# EAGLE board MSP-EXP430FR4133 (EAGLE 6.5.0)
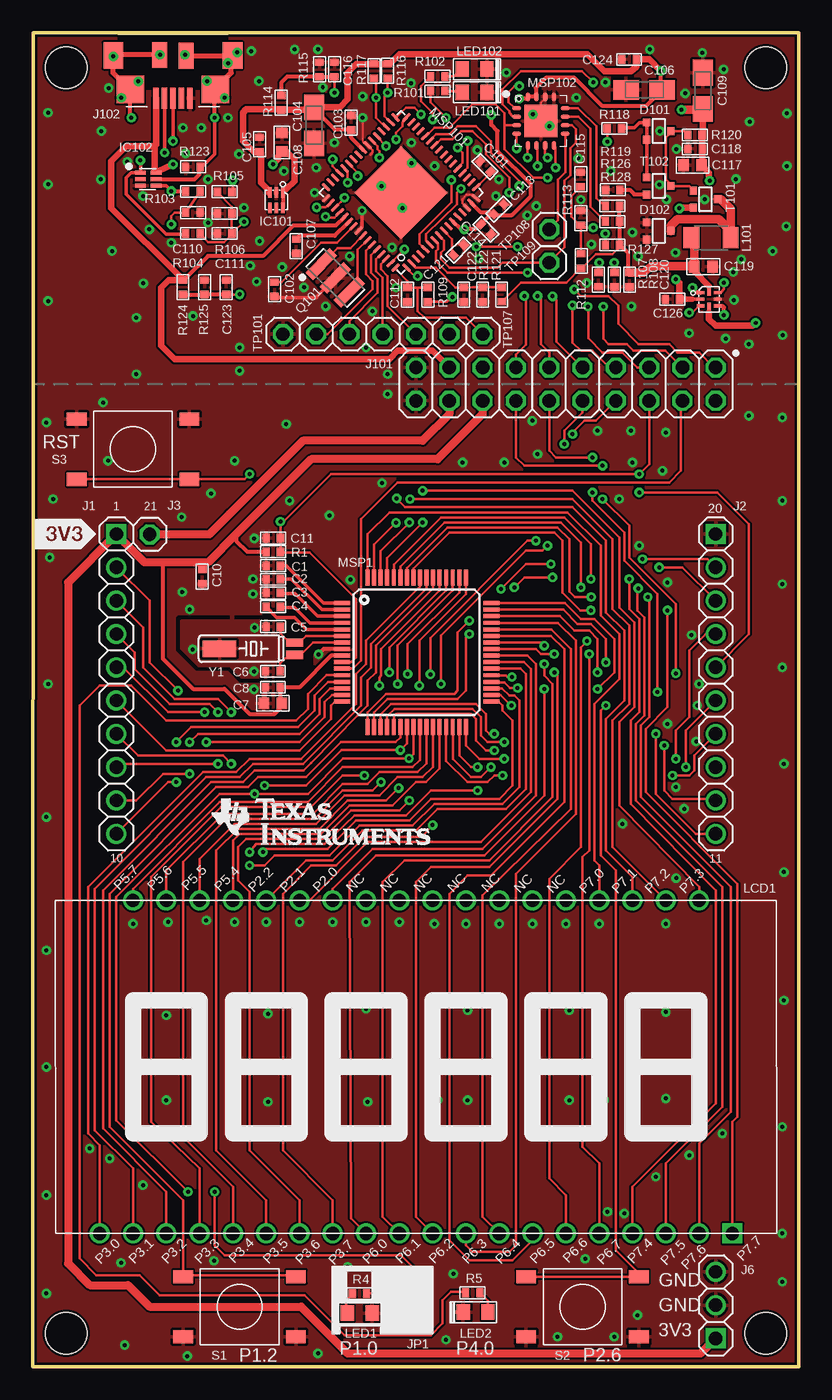
[diagram p0: board, top side]
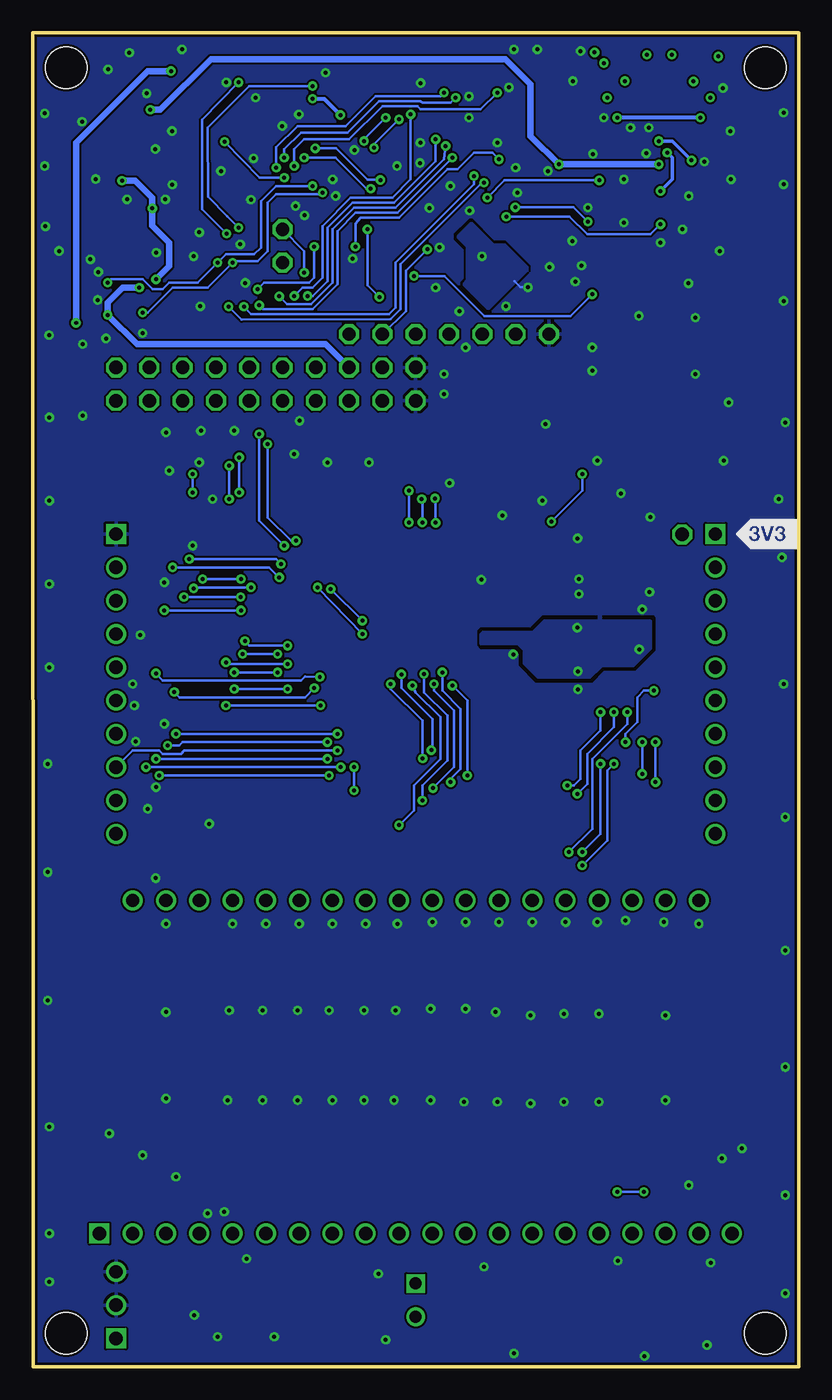
[diagram p1: board, bottom side, seen from below]

Size 58.45 x 101.73 mm. Coordinates in mm from the lower left corner, seen from the top.
Outline: 0,0 58.42,0 58.45,101.73 0.03,101.73 0,0
Copper layers (1*16): Top 0.0178mm / dielectric 12mil / Bottom 0.0178mm
Design rules "default": minimum track width 6mil, minimum drill 12mil, track to track 6mil, track to pad 6mil, pad to pad 6mil, via to via 8mil, smd to smd 0mil, copper to edge 8mil, drill to drill 8mil, minimum pad ring 10mil, minimum via ring 8mil, stop-mask expansion 3mil, vias tented up to drill 15mil, thermal gap 8mil
tRestrict: area 20.5,80.4 to 26.3,87.5; area 10.9,52.2 to 24.5,57.3
bRestrict: area 20.5,80.4 to 26.3,87.5; area 10.9,52.2 to 24.5,57.3

## Footprints (pad centres in the part's own frame; a part is rotated, then mirrored left to right if it is on the bottom)
C0402 = smd 0.55 x 0.65: 1 -0.55,0; 2 0.55,0
C0603 = smd 0.8 x 0.9: 1 -0.7,-0.05; 2 0.7,-0.05
A/3216-18R = smd 1.95 x 1.5: + 1.375,0; - -1.375,0
SOT323 = smd 0.6 x 0.55: 1 -0.65,-0.825; 2 0.65,-0.825; 3 0,1.025
WSON_DSE = smd 0.25 x 0.8: 1 0,0; 2 0.5,0; 3 1,0; 5 0.5,1.15; 6 0,1.15; P4 1,1.15
SON(DRY)6 = smd 0.81 x 0.305: 1 -0.1,0; 2 -0.1,-0.5; 3 -0.1,-1; 4 1.1,-1; 5 1.1,-0.5; 6 1.1,0
UQFN_RSE = smd 0.25 x 0.58: 1 -0.5,-0.65; 2 0,-0.65; 3 0.5,-0.65; 5 0.5,0.65; 6 0,0.65; 7 -0.5,0.65 | smd 0.58 x 0.25: 4 0.55,0; 8 -0.55,0
PINHEAFER1X10 = drill 1.016 square: 1 -11.43,0 | drill 1.016: 2 -8.89,0; 3 -6.35,0; 4 -3.81,0; 5 -1.27,0; 6 1.27,0; 7 3.81,0; 8 6.35,0; 9 8.89,0; 10 11.43,0
1X01 = drill 1.016 octagon: 1 0,0
PINHEADER1X3 = drill 1.016 square: 1 -2.54,0 | drill 1.016: 2 0,0; 3 2.54,0
2X10 = drill 1.016 octagon: 1 -11.43,-1.27; 2 -11.43,1.27; 3 -8.89,-1.27; 4 -8.89,1.27; 5 -6.35,-1.27; 6 -6.35,1.27; 7 -3.81,-1.27; 8 -3.81,1.27; 9 -1.27,-1.27; 10 -1.27,1.27; 11 1.27,-1.27; 12 1.27,1.27; 13 3.81,-1.27; 14 3.81,1.27; 15 6.35,-1.27; 16 6.35,1.27; 17 8.89,-1.27; 18 8.89,1.27; 19 11.43,-1.27; 20 11.43,1.27
EZFET_UX62M-B-5P = smd 0.42 x 1.6: 1 1.3,1.3; 2 0.65,1.3; 3 0,1.3; 4 -0.65,1.3; 5 -1.3,1.3 | smd 2.1 x 2.1: S1 -3.25,0.65; S2 3.25,0.65 | smd 1.5 x 2: S3 -4.55,-1.95; S4 4.55,-1.95 | smd 1.144 x 1.949: S5 -1.016,-1.93; S6 1.016,-1.981
JUMPER-2.54 = drill 0.914 square: 1 0,-1.27 | drill 0.914: 2 0,1.27
L3216C = smd 1.2 x 1.6: 1 -1.5,0; 2 1.5,0
FH1138P = drill 1.016 square: 1 25.4,0 | drill 1.016: 2 22.86,0; 3 20.32,0; 4 17.78,0; 5 15.24,0; 6 12.7,0; 7 10.16,0; 8 7.62,0; 9 5.08,0; 10 2.54,0; 11 0,0; 12 -2.54,0; 13 -5.08,0; 14 -7.62,0; 15 -10.16,0; 16 -12.7,0; 17 -15.24,0; 18 -17.78,0; 19 -20.32,0; 20 -22.86,0; 21 -20.32,25.4; 22 -17.78,25.4; 23 -15.24,25.4; 24 -12.7,25.4; 25 -10.16,25.4; 26 -7.62,25.4; 27 -5.08,25.4; 28 -2.54,25.4; 29 0,25.4; 30 2.54,25.4; 31 5.08,25.4; 32 7.62,25.4; 33 10.16,25.4; 34 12.7,25.4; 35 15.24,25.4; 36 17.78,25.4; 37 20.32,25.4; 38 22.86,25.4
LED0805 = smd 1 x 1.2: A 1.052,0.102; C -0.848,0.102
LQFP64 = smd 1.2 x 0.3: 1 -5.649,3.623; 2 -5.649,3.123; 3 -5.649,2.623; 4 -5.649,2.123; 5 -5.649,1.623; 6 -5.649,1.123; 7 -5.649,0.623; 8 -5.649,0.123; 9 -5.649,-0.377; 10 -5.649,-0.877; 11 -5.649,-1.377; 12 -5.649,-1.877; 13 -5.649,-2.377; 14 -5.649,-2.877; 15 -5.649,-3.377; 16 -5.649,-3.877; 33 5.751,-3.877; 34 5.751,-3.377; 35 5.751,-2.877; 36 5.751,-2.377; 37 5.751,-1.877; 38 5.751,-1.377; 39 5.751,-0.877; 40 5.751,-0.377; 41 5.751,0.123; 42 5.751,0.623; 43 5.751,1.123; 44 5.751,1.623; 45 5.751,2.123; 46 5.751,2.623; 47 5.751,3.123; 48 5.751,3.623 | smd 0.3 x 1.2: 17 -3.699,-5.827; 18 -3.199,-5.827; 19 -2.699,-5.827; 20 -2.199,-5.827; 21 -1.699,-5.827; 22 -1.199,-5.827; 23 -0.699,-5.827; 24 -0.199,-5.827; 25 0.301,-5.827; 26 0.801,-5.827; 27 1.301,-5.827; 28 1.801,-5.827; 29 2.301,-5.827; 30 2.801,-5.827; 31 3.301,-5.827; 32 3.801,-5.827; 49 3.801,5.573; 50 3.301,5.573; 51 2.801,5.573; 52 2.301,5.573; 53 1.801,5.573; 54 1.301,5.573; 55 0.801,5.573; 56 0.301,5.573; 57 -0.199,5.573; 58 -0.699,5.573; 59 -1.199,5.573; 60 -1.699,5.573; 61 -2.199,5.573; 62 -2.699,5.573; 63 -3.199,5.573; 64 -3.699,5.573
RGC64 = smd 0.825 x 0.28: 1 -4.36,3.75; 2 -4.36,3.25; 3 -4.36,2.75; 4 -4.36,2.25; 5 -4.36,1.75; 6 -4.36,1.25; 7 -4.36,0.75; 8 -4.36,0.25; 9 -4.36,-0.25; 10 -4.36,-0.75; 11 -4.36,-1.25; 12 -4.36,-1.75; 13 -4.36,-2.25; 14 -4.36,-2.75; 15 -4.36,-3.25; 16 -4.36,-3.75; 33 4.36,-3.75; 34 4.36,-3.25; 35 4.36,-2.75; 36 4.36,-2.25; 37 4.36,-1.75; 38 4.36,-1.25; 39 4.36,-0.75; 40 4.36,-0.25; 41 4.36,0.25; 42 4.36,0.75; 43 4.36,1.25; 44 4.36,1.75; 45 4.36,2.25; 46 4.36,2.75; 47 4.36,3.25; 48 4.36,3.75 | smd 0.28 x 0.825: 17 -3.75,-4.36; 18 -3.25,-4.36; 19 -2.75,-4.36; 20 -2.25,-4.36; 21 -1.75,-4.36; 22 -1.25,-4.36; 23 -0.75,-4.36; 24 -0.25,-4.36; 25 0.25,-4.36; 26 0.75,-4.36; 27 1.25,-4.36; 28 1.75,-4.36; 29 2.25,-4.36; 30 2.75,-4.36; 31 3.25,-4.36; 32 3.75,-4.36; 49 3.75,4.36; 50 3.25,4.36; 51 2.75,4.36; 52 2.25,4.36; 53 1.75,4.36; 54 1.25,4.36; 55 0.75,4.36; 56 0.25,4.36; 57 -0.25,4.36; 58 -0.75,4.36; 59 -1.25,4.36; 60 -1.75,4.36; 61 -2.25,4.36; 62 -2.75,4.36; 63 -3.25,4.36; 64 -3.75,4.36 | smd 5 x 5: TP 0,0
RSA16 = smd 0.7 x 0.35: 1 -1.85,0.975; 2 -1.85,0.325; 3 -1.85,-0.325; 4 -1.85,-0.975; 9 1.85,-0.975; 10 1.85,-0.325; 11 1.85,0.325; 12 1.85,0.975 | smd 0.35 x 0.7: 5 -0.975,-1.85; 6 -0.325,-1.85; 7 0.325,-1.85; 8 0.975,-1.85; 13 0.975,1.85; 14 0.325,1.85; 15 -0.325,1.85; 16 -0.975,1.85 | smd 2.5 x 2.5: TP 0,0
CSTCR4M = smd 0.8 x 2.6: 1 -1.5,0; 2 0,0; 3 1.5,0
R0402 = smd 0.55 x 0.65: 1 -0.55,0; 2 0.55,0
T062S = smd 1.5 x 1: 1 -4.3,2.3; 2 4.3,2.3; 3 -4.3,-2.3; 4 4.3,-2.3
MOUNTHOLE_125MIL = hole 3.175: 0,0
MS3V-T1R = smd 0.635 x 1.27: P1 -0.47,-4.43; P2 0.47,-4.43 | smd 1.27 x 2.54: P3 0,1.3

## Placement (x,y rotation side)
C1  100n  [C0402]  18.34,61.09 180 top
C2  100n  [C0402]  18.34,60.05 180 top
C3  100n  [C0402]  18.34,59 180 top
C4  1u  [C0402]  18.34,57.96 180 top
C5  12p  [C0402]  18.34,56.44 180 top
C6  12p  [C0402]  18.31,53.04 180 top
C7  10u  [C0603]  18.31,50.55 180 top
C8  100n  [C0402]  18.31,51.82 180 top
C10  100n  [C0402]  12.93,60.25 270 top
C11  1n  [C0402]  18.34,63.2 180 top
C101  470n  [C0402]  34.51,91.53 135 top
C102  220n  [C0402]  18.44,82.17 270 top
C103  100n  [C0402]  24.28,94.87 90 top
C104  10u  [A/3216-18R]  21.46,94.67 90 top
C105  100n  [C0402]  17.3,93.22 90 top
C106  4.7u  [A/3216-18R]  46.63,97.38 0 top
C107  220n  [C0402]  20.09,85.45 270 top
C108  1u  [C0603]  18.95,93.37 90 top
C109  4.7u  [A/3216-18R]  51.11,97.31 270 top
C110  10p  [C0402]  12.22,88.01 0 top
C111  10p  [C0402]  14.63,86.42 180 top
C112  1n  [C0402]  28.58,81.76 270 top
C113  100n  [C0402]  35.55,88.27 45 top
C114  100n  [C0402]  34.57,86.74 315 top
C115  32p  [C0402]  41.81,90.55 270 top
C116  32p  [C0402]  23.01,98.93 270 top
C117  4.7u  [C0603]  50.33,91.57 180 top
C118  100n  [C0402]  50.51,92.88 180 top
C119  4.7u  [C0603]  51.16,83.93 0 top
C120  100n  [C0402]  45.52,82.9 270 top
C121  100n  [C0402]  32.48,85.16 45 top
C122  32p  [C0402]  32.88,81.76 90 top
C123  32p  [C0402]  14.76,82.32 270 top
C124  100n  [C0402]  45.49,99.7 180 top
C126  100n  [C0402]  48.79,81.41 180 top
D101  BAS40-05  [SOT323]  47.65,94.23 270 top
D102  BAS40-05  [SOT323]  47.65,86.61 270 top
DRAW1  [LOGO-ROCKET-10X7MM-BRD]  3.86,81.8 65 top
DRAW3  [LOGO-ROCKET-10X7MM-BRD]  34.15,38.62 7 top
IC101  [WSON_DSE]  19.08,89.53 180 top
IC102  TPD4E004DRYR  [SON(DRY)6]  8.31,91.06 0 top
IC103  TS5A21366RSER  [UQFN_RSE]  51.59,81.41 270 top
J1  [PINHEAFER1X10]  6.38,52.07 270 top
J2  [PINHEAFER1X10]  52.1,52.07 270 top
J3  TEST_PIN2  [1X01]  8.92,63.47 0 top
J6  [PINHEADER1X3]  52.1,4.7 90 top
J101  [2X10]  40.67,74.93 180 top
J102  Micro-USB  [EZFET_UX62M-B-5P]  10.69,98.04 180 top
JP1  [JUMPER-2.54]  29.24,5.08 180 top
L101  2u2  [L3216C]  51.73,86.1 180 top
LCD1  [FH1138P]  27.97,10.16 0 top
LED1  Red  [LED0805]  25.04,4.19 180 top
LED2  Green  [LED0805]  33.68,4.06 0 top
LED101  Red  [LED0805]  33.81,97.28 180 top
LED102  Green  [LED0805]  33.81,99.06 180 top
MSP1  MSP430FR4x  [LQFP64]  29.24,54.61 0 top
MSP101  MSP430F5528IRGC  [RGC64]  28.09,89.54 135 top
MSP102  MSP430G2452IRSA16R  [RSA16]  38.76,95 0 top
Q101  PIEZO_CSTCR4M00G15L99  [CSTCR4M]  23.08,83.02 315 top
R1  47k  [R0402]  18.34,62.15 0 top
R4  470  [R0402]  24.92,5.59 180 top
R5  470  [R0402]  33.55,5.64 0 top
R101  470  [R0402]  30.89,97.28 180 top
R102  470  [R0402]  30.89,98.41 180 top
R103  27  [R0402]  12.22,89.63 0 top
R104  27  [R0402]  12.22,86.42 0 top
R105  1k4  [R0402]  14.63,89.6 0 top
R106  1M  [R0402]  14.63,87.95 180 top
R107  47k  [R0402]  43.15,82.91 270 top
R108  47k  [R0402]  44.37,82.91 270 top
R109  47k  [R0402]  30.14,81.76 270 top
R112  220k  [R0402]  41.84,84.33 90 top
R113  220k  [R0402]  41.81,87.6 90 top
R114  220k  [R0402]  18.95,96.39 90 top
R115  220k  [R0402]  21.87,98.93 90 top
R116  4k7  [R0402]  27.06,98.82 270 top
R117  4k7  [R0402]  26.03,98.82 270 top
R118  820  [R0402]  44.37,94.42 180 top
R119  0  [R0402]  44.24,89.75 180 top
R120  470  [R0402]  50.51,93.94 180 top
R121  220k  [R0402]  35.78,81.76 90 top
R122  220k  [R0402]  34.32,81.76 270 top
R123  33k  [R0402]  12.22,91.5 180 top
R124  240k  [R0402]  11.46,82.32 270 top
R125  150k  [R0402]  13.11,82.32 90 top
R126  2k2  [R0402]  44.22,88.52 180 top
R127  3k3  [R0402]  44.22,85.55 180 top
R128  6k8  [R0402]  44.22,87.33 180 top
S1  T062S  [T062S]  15.77,4.57 180 top
S2  T062S  [T062S]  41.94,4.57 180 top
S3  T062S  [T062S]  7.65,69.98 0 top
T101  DMG1013UW  [SOT323]  51.21,89.03 270 top
T102  BC850CW-115  [SOT323]  47.65,90.04 270 top
TP101  TEST_PIN2  [1X01]  19.08,78.74 0 top
TP102  TEST_PIN2  [1X01]  21.62,78.74 0 top
TP103  TEST_PIN2  [1X01]  24.16,78.74 0 top
TP104  TEST_PIN2  [1X01]  26.7,78.74 0 top
TP105  TEST_PIN2  [1X01]  29.24,78.74 0 top
TP106  TEST_PIN2  [1X01]  31.78,78.74 0 top
TP107  TEST_PIN2  [1X01]  34.32,78.74 0 top
TP108  TEST_PIN2  [1X01]  39.4,86.74 0 top
TP109  TEST_PIN2  [1X01]  39.4,84.2 0 top
U$2  MOUNTHOLE_125MIL  [MOUNTHOLE_125MIL]  2.57,2.54 0 top
U$3  MOUNTHOLE_125MIL  [MOUNTHOLE_125MIL]  2.57,99.06 0 top
U$4  [LOGO16_TPLACE]  13.55,39.64 0 top
U$5  MOUNTHOLE_125MIL  [MOUNTHOLE_125MIL]  55.91,2.54 0 top
U$6  MOUNTHOLE_125MIL  [MOUNTHOLE_125MIL]  55.91,99.06 0 top
U$7  SILK_3V3_TAG  [SILK_3V3_TAG]  0.03,62.36 0 top
U$8  SILK_FR4133_REAR_REV02  [SILK_FR4133_REAR_REV02]  0.03,0.13 0 top
Y1  32.768kHz  [MS3V-T1R]  15.54,54.76 90 top

## Library data of the parts
C1-C8 C10 C11 C101-C124 C126 L101 R1 R4 R5 R101-R109 R112-R128 = rcl
D101 D102 LCD1 MSP1 Q101 T101 T102 = MSP430G6_LP
DRAW1 DRAW3 = TI-LaunchPad-Eagle
IC101 IC103 = roy
IC102 = eZFET
J1 J2 J6 JP1 LED1 LED2 LED101 LED102 S1-S3 U$8 = launchpad
J3 J101 TP101-TP109 = pinhead
J102 = MSP-EXP430G6021
MSP101 MSP102 = TI_MSP430_v16
U$2 U$3 U$5-U$7 = MSP-EXP432
U$4 = sti_logo
Y1 = microcrystal

## Nets
5V: J3.1 J101.18
+3V3: C7.1 C8.1 C10.1 J1.1 J6.1 J101.16 MSP1.9 R1.1
EZFET_AVBUS: C123.2 MSP101.1 R124.2 R125.1
EZFET_AVCC: C116.2 MSP102.6 R114.2 R115.1
EZFET_AVCCOUT: C115.2 MSP102.1 R112.2 R113.1
EZFET_AVCCOUT2ADC: C122.2 MSP101.2 R121.2 R122.1
EZFET_DCDCCAL0: MSP102.12 R126.2
EZFET_DCDCCAL1: MSP102.2 R127.2
EZFET_DCDCCAL2: MSP102.11 R128.2
EZFET_DCDCIO0: MSP101.5 MSP102.4
EZFET_DCDCIO1: MSP101.6 MSP102.5
EZFET_DCDCPULSE: MSP101.28 MSP102.3 R118.2
EZFET_DCDCRST: MSP101.7 MSP102.9 TP108.1
EZFET_DCDCTEST: MSP101.8 MSP102.10 TP109.1
EZFET_DM: IC102.4 J102.2 R103.1
EZFET_DP: IC102.1 J102.3 R104.1
EZFET_HOSTSCL: MSP101.35 MSP102.7 R117.2
EZFET_HOSTSDA: MSP101.34 MSP102.8 R116.2
EZFET_LED0: MSP101.20 R101.2
EZFET_LED1: MSP101.21 R102.2
EZFET_NC_TMSC: J101.1 MSP101.45
EZFET_PU.0/DP: C111.1 MSP101.50 R104.2 R105.1 R106.1
EZFET_PU.1/DM: C110.1 MSP101.52 R103.2
EZFET_PUR: MSP101.51 R105.2
EZFET_RST: C112.1 MSP101.64 R109.1 TP107.1
EZFET_SBWTCK: J101.3 MSP101.44
EZFET_SBWTDIO: J101.5 MSP101.43
EZFET_SHIELD: IC102.5 J102.S1 J102.S2 J102.S3 J102.S4 J102.S5 J102.S6 R123.1
EZFET_TCK: MSP101.63 TP106.1
EZFET_TDI: MSP101.61 TP104.1
EZFET_TDO: MSP101.60 TP103.1
EZFET_TEST: MSP101.59 TP102.1
EZFET_TMS: MSP101.62 TP105.1
EZFET_UARTCTS: J101.13 MSP101.32
EZFET_UARTRTS: J101.11 MSP101.33
EZFET_UARTRXD: J101.7 MSP101.38
EZFET_UARTTXD: J101.9 MSP101.37
EZFET_V18: C102.1 MSP101.55
EZFET_VBUS: C108.1 C109.+ C117.1 C118.1 C126.1 IC101.1 IC101.6 IC102.6 IC103.2 J101.17 J102.1 MSP101.53 R120.1 R124.1 T101.2
EZFET_VCC: C103.1 C104.+ C105.1 C106.+ C113.1 C114.1 C124.1 IC101.3 IC103.4 MSP101.11 MSP101.15 MSP101.40 MSP102.15 MSP102.16 R109.2 R114.1 R116.1 R117.1
EZFET_VCCEN1: IC103.3 MSP101.26 R107.1
EZFET_VCCEN2: IC103.7 MSP101.27 R108.1
EZFET_VCCOUT: C119.1 C120.1 IC103.8 L101.2 R112.1 R121.1 R126.1 R127.1 R128.1
EZFET_VCCTARGET: IC103.1 IC103.5 J101.15
EZFET_VCORE: C101.1 MSP101.17
EZFET_VREF: C121.1 MSP101.9
EZFET_VUSB: C107.1 MSP101.54
EZFET_XT2IN: MSP101.57 Q101.1
EZFET_XT2OUT: MSP101.58 Q101.3
GND: C1.2 C2.2 C3.2 C5.2 C6.2 C7.2 C8.2 C10.2 C11.2 C101.2 C102.2 C103.2 C104.- C105.2 C106.- C107.2 C108.2 C109.- C110.2 C111.2 C112.2 C113.2 C114.2 C115.1 C116.1 C117.2 C118.2 C119.2 C120.2 C121.2 C122.1 C123.1 C124.2 C126.2 D102.1 D102.2 IC101.2 IC102.3 IC103.6 J2.1 J6.2 J6.3 J101.19 J101.20 J102.5 LED1.C LED2.C LED101.C LED102.C MSP1.8 MSP101.14 MSP101.16 MSP101.39 MSP101.49 MSP101.56 MSP101.TP MSP102.13 MSP102.14 MSP102.TP Q101.2 R106.2 R107.2 R108.2 R113.2 R115.2 R119.2 R122.2 R123.2 R125.2 S1.1 S1.2 S2.1 S2.2 S3.1 S3.2 TP101.1 Y1.P3
L0: LCD1.35 MSP1.64
L1: LCD1.36 MSP1.63
L2: LCD1.37 MSP1.62
L3: LCD1.38 MSP1.61
L4: LCD1.4 MSP1.60
L5: LCD1.3 MSP1.59
L6: LCD1.2 MSP1.58
L7: LCD1.1 MSP1.57
L8: LCD1.20 MSP1.56
L9: LCD1.19 MSP1.55
L10: LCD1.18 MSP1.54
L11: LCD1.17 MSP1.53
L12: LCD1.16 MSP1.52
L13: LCD1.15 MSP1.51
L14: LCD1.14 MSP1.50
L15: LCD1.13 MSP1.49
L16: LCD1.12 MSP1.48
L17: LCD1.11 MSP1.47
L18: LCD1.10 MSP1.46
L19: LCD1.9 MSP1.45
L20: LCD1.8 MSP1.44
L21: LCD1.7 MSP1.43
L22: LCD1.6 MSP1.42
L23: LCD1.5 MSP1.41
L24: LCD1.27 MSP1.40
L25: LCD1.26 MSP1.39
L26: LCD1.25 MSP1.38
L36: LCD1.24 MSP1.28
L37: LCD1.23 MSP1.27
L38: LCD1.22 MSP1.26
L39: LCD1.21 MSP1.25
N$1: LED101.A R101.1
N$2: LED102.A R102.1
N$4: C1.1 MSP1.1
N$6: JP1.2 R4.1
N$7: LED1.A R4.2
N$8: LED2.A R5.2
N$10: C2.1 MSP1.2
N$11: C4.1 MSP1.4
N$12: R119.1 T102.2
N$13: D101.1 D101.2 R118.1 T102.1
N$14: C5.1 MSP1.6 Y1.P2
N$15: D102.3 L101.1 T101.3
N$16: D101.3 R120.2 T101.1 T102.3
N$17: C4.2 MSP1.5
N$18: C6.1 MSP1.7 Y1.P1
N$19: C3.1 MSP1.3
P1.0/TXD: J1.4 J101.8 JP1.1 MSP1.24
P1.1/RXD: J1.3 J101.10 MSP1.23
P1.2: MSP1.22 S1.3 S1.4
P1.3: J2.8 MSP1.21
P1.4: J2.9 MSP1.20
P1.5: J2.10 MSP1.19
P1.6: J2.3 MSP1.18
P1.7: J2.2 MSP1.17
P2.3/RTS: J101.14 MSP1.37
P2.4/CTS: J101.12 MSP1.36
P2.5: J1.8 MSP1.35
P2.6: MSP1.34 S2.3 S2.4
P2.7: J1.5 MSP1.33
P4.0: MSP1.12 R5.1
P5.0: J2.4 MSP1.32
P5.1: J1.7 MSP1.31
P5.2: J2.6 MSP1.30
P5.3: J2.7 MSP1.29
P8.0: J1.6 MSP1.16
P8.1: J1.2 MSP1.15
P8.2: J1.9 MSP1.14
P8.3: J1.10 MSP1.13
RST/SBWTDIO: C11.1 J2.5 J101.6 MSP1.10 R1.2 S3.3 S3.4
TEST/SBWTCK: J101.4 MSP1.11

## Tracks (layer width: path | path; a pad name or v marks a point on that pad's centre or on a via)
5V
  Top 0.152: 8.92,63.5 J3.1
  Top 0.61: J101.18 31.78,72.64 29.74,70.61 20.6,70.61 15.01,65.02 13.46,63.48 J3.1
+3V3
  Top 0.203: 19.01,50.36 C7.1
  Top 0.305: MSP1.9 22.76,54.23 20.35,51.82 C8.1 18.86,50.47 C7.1 19.01,50.57 | 15.52,63.5 15.52,62.98 16.35,62.15 R1.1 | 10.06,61.34 9.93,61.21 9.93,53.98 12.22,51.69 14.63,51.69 16.54,49.78 18.44,49.78 19.01,50.36 | C10.1 12.93,61.34
  Top 0.61: J6.1 50.95,1.02 24.03,1.02 20.47,4.57 8.92,4.57 7.26,6.22 4.34,6.22 2.69,7.87 2.69,59.82 J1.1 8.53,61.34 10.06,61.34 12.93,61.34 13.36,61.34 15.52,63.5 21.23,69.22 30.89,69.22 34.32,72.64 J101.16
EZFET_AVBUS  (via drill 0.3)
  Top 0.203: v29.36,83.19 29.11,83.19 28.52,83.77 MSP101.1 | C123.2 15.38,81.77 v15.77,81.79
  Top 0.305: R124.2 12.96,81.77 12.98,81.79 13.12,81.79 | C123.2 R125.1 13.12,81.79 | 13.23,81.79 13.12,81.79
  Bottom 0.203: v29.36,83.19 27.03,83.19 23.98,80.14 17.42,80.14 v15.77,81.79
EZFET_AVCC  (via drill 0.3)
  Top 0.152: 38.51,93.08 38.51,93.09 MSP102.6
  Top 0.203: 23.01,98.28 v23.01,97.16 | v38.51,91.57 38.51,93.08
  Top 0.305: 23.01,98.28 C116.2 | C116.2 23.01,98.43 22.97,98.38 R115.1 19.41,98.38 18.95,97.92 R114.2 | 23.01,98.3 C116.2 | C116.2 | R114.2
  Bottom 0.203: v23.01,97.16 24.28,95.89 28.85,95.89 29.11,96.14 31.78,96.14 34.32,93.6 37.74,93.6 38.51,92.84 v38.51,91.57
EZFET_AVCCOUT  (via drill 0.3)
  Top 0.152: 36.73,96.01 36.86,96.01 MSP102.1
  Top 0.203: R113.1 41.81,85.98 41.81,84.96 41.83,84.96 R112.2 | R113.1 42.03,86.87 v42.75,86.87 | 36.73,96.01 36.27,96.44 36.27,97.21 36.73,97.66 v37.11,97.66 | 41.78,89.97 41.78,89.94 41.83,89.89 41.86,89.92 | 41.86,89.82 41.86,89.92 | 41.86,89.92 41.86,89.95 41.83,89.97 | C115.2 41.79,90 41.07,89.28 41.07,87.71 41.68,87.1 41.77,86.84 R113.1
  Top 0.508: C115.2 41.78,89.97
  Bottom 0.203: v37.11,97.66 41.94,97.66 45.11,94.49 45.09,89.23 43.61,87.76 v42.75,86.87
EZFET_AVCCOUT2ADC
  Top 0.203: R121.2 34.21,82.31 R122.1 33.59,82.31 C122.2 32.55,82.31 32.25,82.31 30.76,83.82 29.21,83.82 MSP101.2
EZFET_DCDCCAL0
  Top 0.203: R126.2 43.7,88.39 43.33,88.77 42.98,89.13 42.98,94.62 41.6,95.97 MSP102.12
EZFET_DCDCCAL1  (via drill 0.3)
  Top 0.203: MSP102.2 36.85,95.38 36.6,95.38 36.35,95.63 36.35,95.76 35.84,96.27 35.84,97.41 37.24,98.81 41.88,98.81 v42.75,97.94 | R127.2 43.67,85.51 43.66,85.88 43.66,86.34 43.69,86.36 43.66,86.36 v43.66,86.41
  Bottom 0.203: v42.75,97.94 45.54,95.1 45.54,88.27 v43.66,86.41
EZFET_DCDCCAL2
  Top 0.203: R128.2 42.55,88.45 42.55,94.41 41.63,95.33 40.63,95.33 MSP102.11
EZFET_DCDCIO0  (via drill 0.3)
  Top 0.203: v36.91,92.91 36.91,93.15 MSP102.4 | v31.93,90.5 31.93,88.8 29.49,86.36 29.49,85.66 MSP101.5
  Bottom 0.203: v36.91,92.91 35.31,92.91 32.92,90.53 32.16,90.53 v31.93,90.5
EZFET_DCDCIO1  (via drill 0.3)
  Top 0.203: 30.12,85.74 MSP101.6 30,85.86 30,86.36 32.35,88.66 32.36,88.67 32.36,89.53 v32.66,89.84 | v37.74,92.2 37.74,93.11 MSP102.5
  Bottom 0.203: v37.74,92.2 35.33,92.2 32.97,89.84 v32.66,89.84
EZFET_DCDCPULSE  (via drill 0.3)
  Top 0.203: R118.2 43.82,93.72 v43.82,93.42 | v39.27,90.68 38.18,90.68 35.97,92.84 35.97,94.74 | 35.97,94.74 35.97,95.61 35.31,96.27 33.55,96.27 31.78,94.49 30.63,94.49 30,93.86 MSP101.28 | 35.97,94.74 36.04,94.67 MSP102.3
  Bottom 0.203: v39.27,90.68 41.15,90.68 v43.82,93.42
EZFET_DCDCRST  (via drill 0.3)
  Top 0.203: MSP101.7 30.66,85.9 30.91,85.65 30.91,85.24 30.76,85.09 30.76,84.33 31.65,83.44 v37.74,83.44 | 40.78,93.98 MSP102.9 40.61,91.08 40.06,90.53 40.06,87.43 TP108.1 | TP108.1 39.42,86.77 39.37,86.82 TP108.1
  Top 0.305: TP108.1
  Bottom 0.203: TP108.1 | TP108.1 37.74,85.09 v37.74,83.44
EZFET_DCDCTEST
  Top 0.203: MSP101.8 31,86.25 31.37,85.88 31.37,85.19 31.14,84.96 31.14,84.46 31.78,83.82 35.46,83.82 35.84,84.2 TP109.1 39.8,84.61 40.56,85.37 40.56,90.45 41,90.88 41,92.91 41.43,93.34 41.43,94.36 41.12,94.67 40.74,94.67 40.67,94.74 40.67,94.62 MSP102.10
EZFET_DM  (via drill 0.3)
  Top 0.203: J102.2 10.04,96.66
  Top 0.254: IC102.4 10.17,90.06 v10.57,89.66 | 10.04,96.66 v10.06,92.58
  Top 0.305: v10.57,89.66 11.58,89.66 11.61,89.63 R103.1
  Bottom 0.254: v10.57,89.66 9.68,90.55 9.68,92.2 v10.06,92.58
EZFET_DP  (via drill 0.3)
  Top 0.254: v8.2,92 v8.21,92.01 IC102.1 7.52,91.06 7.14,90.68 7.14,89.41 10.19,86.36 11.5,86.36 R104.1 | J102.3 v10.69,93.47
  Bottom 0.254: v10.69,93.47 9.68,93.47 v8.2,92
EZFET_HOSTSCL  (via drill 0.3)
  Top 0.152: MSP101.35 26.95,94.62 26.95,94.61
  Top 0.203: 26.95,94.61 26.83,94.61 26.19,95.25 v26.19,96.77 26.19,98.25 | v39.27,92.2 39.09,92.36 MSP102.7
  Top 0.305: 26.19,98.25 R117.2
  Bottom 0.203: v26.19,96.77 26.57,96.39 28.73,96.39 28.85,96.52 32.03,96.52 34.44,94.11 38,94.11 39.27,92.84 v39.27,92.2
EZFET_HOSTSDA  (via drill 0.3)
  Top 0.203: MSP101.34 27.28,94.92 26.82,95.38 26.82,96.9 v27.08,97.16 27.08,98.16 R116.2 | MSP102.8 39.88,92.98 v39.88,91.44
  Bottom 0.203: v27.08,97.16 27.33,96.9 32.28,96.9 34.57,94.62 38.25,94.62 39.88,92.99 v39.88,91.44
EZFET_LED0  (via drill 0.3)
  Top 0.203: MSP101.20 33.17,91.44 v33.17,93.47 | v31.52,95.25 30.34,96.44 R101.2
  Bottom 0.203: v33.17,93.47 33.17,93.6 v31.52,95.25
EZFET_LED1  (via drill 0.3)
  Top 0.203: R102.2 30.24,98.28 29.62,97.66 29.62,96.52 30.51,95.63 v30.51,95.12 | MSP101.21 32.41,91.44 32.79,91.82 32.79,92.58 v32.41,92.96
  Bottom 0.203: v32.41,92.96 32.41,93.22 v30.51,95.12
EZFET_NC_TMSC  (via drill 0.3)
  Top 0.203: J101.1 51.97,76.2 50.83,77.34 49.17,77.34 48.54,77.98 46.2,77.98 44.65,79.53 44.65,80.92 43.92,81.66 41.81,81.66 v41.3,82.17 | MSP101.45 22.89,91.57 v22.89,92.08 | 36.98,85.47 v36.98,85.42 36.98,85.34 36.93,85.42 v33.83,85.42
  Bottom 0.203: v22.89,92.08 23.39,92.58 24.79,92.58 26.06,91.31 26.82,91.31 30.51,87.63 33.43,87.63 33.83,87.17 v33.83,85.42 | v36.98,85.42 36.98,83.06 37.36,82.68 40.79,82.68 v41.3,82.17
EZFET_PU.0/DP  (via drill 0.3)
  Top 0.152: 22.76,88.77 MSP101.50
  Top 0.203: v16.1,87.33 15.33,86.55 C111.1 | R105.1 15.18,88.48 R106.1 15.18,87.47 C111.1 | R104.2 13.39,85.78 14.58,85.78 15.15,86.35 C111.1 | 22.76,88.77 22.5,88.52 22.45,88.52 22.35,88.42 v21.64,88.42
  Bottom 0.203: v16.1,87.33 17.2,88.42 v21.64,88.42
EZFET_PU.1/DM  (via drill 0.3)
  Top 0.203: R103.2 12.74,89.56 C110.1 10.82,88.01 10.57,87.76 v10.57,87.12 | MSP101.52 23.01,87.63 22.5,87.63 v22.33,87.71
  Bottom 0.203: v22.33,87.71 17.5,87.71 16.15,86.36 11.33,86.36 v10.57,87.12
EZFET_PUR  (via drill 0.3)
  Top 0.203: MSP101.51 23.52,88.85 v23.77,89.15 | v15.24,90.48 15.25,89.7 R105.2
  Bottom 0.203: v15.24,90.48 22.45,90.48 v23.77,89.15
EZFET_RST
  Top 0.203: MSP101.64 27.79,83.62 28.6,82.8 28.6,82.37 C112.1 R109.1 | TP107.1 33.05,80.01 29.87,80.01 29.36,80.52 29.36,82.3 30.12,82.3 R109.1 | R109.1 | R109.1 30.12,82.3
EZFET_SBWTCK  (via drill 0.3)
  Top 0.203: MSP101.44 23.75,91.39 24.03,91.11 v24.03,90.3 | J101.3 48.26,77.47 45.82,77.47 45.31,77.98 43.92,77.98 43.51,78.38 v43.51,80.85
  Bottom 0.203: v24.03,90.3 24.28,90.17 30.38,84.07 30.38,80.65 31.14,79.88 42.52,79.86 v43.51,80.85
EZFET_SBWTDIO  (via drill 0.3)
  Top 0.203: MSP101.43 24.79,91.06 v24.79,90.81 | J101.5 46.13,76.2 44.98,77.34 43.46,77.34 42.37,78.44 42.37,80.82 v42.34,80.85
  Bottom 0.203: v24.79,90.81 24.79,90.17 30.76,84.2 30.76,80.77 31.27,80.26 41.78,80.29 v42.34,80.85
EZFET_SHIELD  (via drill 0.3)
  Top 0.152: 14,97.03 13.87,96.9 13.87,96.77
  Top 0.203: 7.44,95.12 7.52,95.12 v7.52,95.25 | 7.44,96.77 7.39,96.77 | 7.39,96.77 7.39,97.28 | v6.76,96.77 7.39,96.77 | v14.63,96.77 13.87,96.77
  Top 0.254: R123.1 12.92,91.5 13.87,92.46 v13.87,95.25
  Top 0.305: IC102.5 12.21,90.56 12.34,90.55 12.73,90.93 12.73,91.34 R123.1 12.73,91.23 | 7.44,95.12 7.44,96.77 | v13.87,95.25 13.87,96.77
  Top 0.381: J102.S2 7.41,97.39 6.12,98.68 6.12,99.95 6.14,99.97 J102.S4 | J102.S4 v6.14,99.93 v6.15,99.92 | 14,97.03 14,97.45 | J102.S2 7.44,97.33 7.39,97.28 | v8.05,98.02 8.05,98 J102.S2 | v13.28,98.04 v13.29,98.04 J102.S1 14,97.45 | 14,97.45 14,97.54 15.14,98.68 15.14,99.16 v14.88,99.42 14.88,99.64 J102.S3 | v15.6,100.23 15.6,99.97 J102.S3 | J102.S3 15.22,99.97 J102.S5 11.68,99.97 v11.61,100.05 | 9.68,100.05 6.2,100.05 J102.S4
  Top 0.406: J102.S6 9.68,100.05 v9.7,100.05
  Bottom 0.305: v7.52,95.25 v13.87,95.25
EZFET_TCK  (via drill 0.3)
  Top 0.203: v28.35,85.22 27.31,84.18 MSP101.63
  Bottom 0.203: v28.35,85.22 29.97,83.59 29.97,80.49 TP106.1 | TP106.1
EZFET_TDI
  Top 0.203: MSP101.61 26.59,84.86 26.19,84.46 26.19,83.57 26.7,83.06 TP104.1 | TP104.1
EZFET_TDO
  Top 0.203: TP103.1 24.16,79.76 26.31,81.92 26.31,82.93 25.81,83.44 25.81,84.77 MSP101.60
EZFET_TEST
  Top 0.203: 25.93,85.6 25.92,85.6 MSP101.59 25.43,85.1 25.43,83.31 25.93,82.8 25.93,82.17 22.5,78.74 TP102.1
EZFET_TMS
  Top 0.203: MSP101.62 26.95,84.46 26.57,84.07 26.57,83.69 27.08,83.19 27.08,80.9 TP105.1
EZFET_UARTCTS  (via drill 0.3)
  Top 0.203: 28.35,95.12 28.22,94.87 28.22,94.62 27.71,94.11 v27.71,93.6 | 37.62,81.53 v37.49,81.66 37.62,81.53 | J101.13 36.86,77.19 37.62,77.95 37.62,81.53
  Top 0.254: MSP101.32 28.49,95.27 28.35,95.12
  Bottom 0.203: v27.71,93.6 27.71,91.95 30.89,88.77 34.06,88.77 35.97,86.87 35.97,82.8 37.11,81.66 v37.49,81.66
EZFET_UARTRTS  (via drill 0.3)
  Top 0.203: 27.69,95.27 27.71,95.25 | 27.84,95.12 27.71,95.25 | 27.71,95.25 28.47,96.01 29.11,96.01 v29.62,95.5 | J101.11 39.4,77.34 38.76,77.98 38.76,81.41 v38.51,81.66
  Top 0.254: MSP101.33 27.69,95.27
  Bottom 0.203: v29.62,95.5 29.62,90.55 31.01,89.15 34.19,89.15 36.35,87 36.35,83.06 37.11,82.3 37.87,82.3 v38.51,81.66
EZFET_UARTRXD  (via drill 0.3)
  Top 0.203: MSP101.38 26.31,93.09 26.31,92.84 26.44,92.71 v26.44,92.2 | J101.7 43.97,76.2 42.7,77.47 41.81,77.47 41.17,78.11 v41.17,80.95
  Bottom 0.203: v26.44,92.2 30.63,88.01 33.81,88.01 35.2,86.61 35.2,82.55 37.11,80.65 40.87,80.65 v41.17,80.95
EZFET_UARTTXD  (via drill 0.3)
  Top 0.203: MSP101.37 26.25,93.79 v26.95,93.09 | J101.9 39.95,78.18 39.95,81.33 v39.65,81.64
  Bottom 0.203: v26.95,93.09 27.08,92.08 30.76,88.39 33.93,88.39 35.59,86.74 35.59,82.68 37.24,81.03 39.04,81.03 v39.65,81.64
EZFET_V18
  Top 0.203: MSP101.55 24.45,86.96 23.22,85.73 22,85.73 18.99,82.72 C102.1
EZFET_VBUS  (via drill 0.3)
  Top 0.203: 9.3,91.19 9.3,91.06 IC102.6 | 9.55,91.19 IC102.6 | IC102.6 | 51.1,95.66 51.1,95.93 C109.+
  Top 0.254: IC103.2 50.32,81.41
  Top 0.305: MSP101.53 23.11,87.02 19.86,87.02 17.55,84.71 13.36,84.71 11.71,83.06 11.33,83.06 | 19.33,89.79 IC101.1 IC101.6
  Top 0.406: 50.32,81.41 C126.1 49.3,81.41
  Top 0.508: 9.3,93.09 9.3,91.19 | 9.55,91.19 v10.69,91.69 | J101.17 30.51,77.47 27.84,77.47 27.2,76.84 10.82,76.84 9.8,77.85 9.8,82.3 10.38,82.87 R124.1 11.33,83.06 5.99,88.37 5.99,91.95 7.14,93.09 9.3,93.09 | v18.31,91.69 18.69,92.08 18.69,92.33 19.08,92.71 19.04,92.71 C108.1 19.37,92.67 19.96,92.08 19.96,90.42 19.33,89.79 | J102.1 9.39,93.19 9.3,93.09 | 51.1,95.66 51.1,94.01 51.06,93.96 R120.1 C118.1 51.06,91.65 C117.1 51.59,91.06 51.59,90.42 51.61,90.42 v51.64,90.45 | T101.2 49.32,88.38 | 49.32,88.38 49.3,88.39 | v49.33,88.34 49.33,88.37 49.32,88.38 | v49.05,82.93 49.3,82.68 49.3,81.45 C126.1
  Top 0.635: C109.+ 50.62,95.88 50.39,95.86 v49.48,95.86
  Bottom 0.305: 48.87,95.81 48.74,95.86
  Bottom 0.508: v10.69,91.69 v18.31,91.69 20.47,93.85 20.47,97.79 22.38,99.7 44.86,99.7 48.74,95.86 v49.48,95.86 | v51.64,90.45 50.62,90.45 49.33,89.15 v49.33,88.34 49.33,87.02 48.03,85.73 48.03,83.95 v49.05,82.93
EZFET_VCC  (via drill 0.3)
  Top 0.152: MSP101.11 32.03,87.38 32.07,87.34 | 33.86,86.79 C114.1 | 33.43,88.77 MSP101.15
  Top 0.203: 24.66,93.32 MSP101.40 | v32,81.59 31.58,81.21 R109.2 | R116.1 27.08,99.44 | C114.1 34.06,87.12 | 33.86,86.79 34.13,87.06 | 34.95,94.74 34.98,94.77
  Top 0.254: 17.93,89.53 IC101.3 | IC103.4 51.59,80.39
  Top 0.305: MSP101.40 25.19,92.82 24.28,93.73 C103.1 23.05,94.32 21.49,95.89 21.49,96.01 C104.+ | 25.52,99.34 R117.1 25.44,99.31 | 46.17,99.73 C124.1 46.04,99.2 45.99,99.1 | 48.14,97.71 C106.+ | 43.59,98.81 45.69,98.81 45.99,99.1 | 38.42,96.82 38.38,97.03 38.38,97.54 39.14,98.3 41.3,98.3 43.46,96.14 46.76,96.14 47.56,96.93 C106.+ | 38.42,96.82 38.43,96.75 | 33.6,88.61 MSP101.15 | 32.07,87.34 32.66,86.74 v32.92,86.74 33.76,86.74 34.13,87.06 35.08,88.01 | v37.11,96.7 37.64,96.7 MSP102.16 MSP102.15 38.42,96.82 | C106.+ 47.73,97.38 47.9,97.59 v47.9,98.81 | 46.06,99.05 45.99,99.1 | 35.08,88.01 35.38,87.83 36.55,87.83 38,89.28 38,90.17 35.46,92.71 35.46,94.23 34.98,94.72 34.98,94.77 v34.98,95.45 | 35.08,88.01 35.14,88.01 C113.1 | 35.08,88.01 34.19,88.01 33.43,88.77
  Top 0.406: 17.85,89.88 17.93,89.75 17.93,89.53 | 17.42,92.46 17.3,92.46 C105.1 17.3,92.62 16.88,92.62
  Top 0.508: 16.88,92.62 16.03,93.47 16.03,95.63 16.28,95.89 18.91,95.89 R114.1 21.26,95.84 C104.+ 23.42,96.04 24.03,96.65 24.03,98.68 24.66,99.31 25.44,99.31 27,99.31 R116.1 27.26,99.37 27.97,100.08 42.32,100.08 43.59,98.81 45.62,98.81 46.02,99.14 46.02,99.64 | 17.85,89.88 17.42,90.3 17.42,92.46 17.34,92.67 17.35,92.67 | v47.9,98.81 47.02,99.7 C124.1 | v55.14,79.6 55.14,79.63 54.89,79.38 52.1,79.38 51.59,79.88 51.59,80.39
  Bottom 0.203: v32.92,86.74 32.92,82.5 v32,81.59
  Bottom 0.305: v37.11,96.7 36.22,96.7 v34.98,95.45
  Bottom 0.508: v47.9,98.81 49.68,98.81 55.14,93.34 v55.14,79.6
EZFET_VCCEN1  (via drill 0.3)
  Top 0.203: MSP101.26 30.69,93.15 31.14,93.6 32.03,93.6 32.66,94.23 33.55,94.23 34.57,93.22 34.57,92.46 36.35,90.68 v36.35,89.53 | v50.06,80.39 50.32,80.39 50.83,80.91 IC103.3 | R107.1 43.15,83.88 v43.21,84.2
  Bottom 0.203: v36.35,89.53 36.47,89.41 39.9,89.41 40.54,88.77 40.54,85.09 41.3,84.33 43.08,84.33 v43.21,84.2 45.11,82.3 47.78,82.3 49.68,80.39 v50.06,80.39
EZFET_VCCEN2  (via drill 0.3)
  Top 0.203: MSP101.27 30.29,93.51 30.76,93.98 31.78,93.98 32.41,94.62 33.81,94.62 34.95,93.47 34.95,92.58 37.11,90.42 v37.11,90.04 | R108.1 v44.35,84.2 | IC103.7 52.47,81.91 52.73,82.17 v52.73,82.68
  Bottom 0.203: v37.11,90.04 39.9,90.04 41.05,88.9 41.05,85.34 41.55,84.84 43.71,84.84 v44.35,84.2 45.87,82.68 48.03,82.68 48.54,82.17 49.3,82.17 50.06,82.93 52.48,82.93 v52.73,82.68
EZFET_VCCOUT
  Top 0.203: R121.1 35.93,81.37 37.24,82.68 40.69,82.68 41.81,83.81 | 41.81,83.81 41.81,83.82 41.94,83.82 42.95,84.84 44.22,84.84 44.73,85.34 44.73,85.38 R127.1 | 41.81,83.81 R112.1
  Top 0.254: 51.59,82.42 IC103.8
  Top 0.305: R126.1 44.74,88.01 R128.1 R127.1 45.4,84.96 45.4,83.45 C120.1 | 46.63,83.48 46.63,83.45
  Top 0.508: 50.55,83.92 50.55,83.46 51.59,82.42
  Top 0.635: 46.63,83.48 47.19,83.92 50.43,83.92 C119.1 50.46,83.9 50.47,83.9 | L101.2 50.44,85.82 50.44,84.18 50.42,84.18 50.42,84.07 50.55,84.07 50.55,83.92 50.47,83.92 50.47,83.9 | 50.47,83.87 50.47,83.9 | 46.63,83.45 C120.1
EZFET_VCCTARGET  (via drill 0.3)
  Top 0.254: IC103.5 52.21,80.91
  Top 0.305: IC103.1 50.71,81.91 v50.32,82.3 | 52.21,80.91 52.6,80.91 52.73,80.77 v52.73,80.21
  Bottom 0.508: J101.15 36.09,77.98 50.5,77.98 v52.73,80.21 52.73,81.15 51.59,82.3 v50.32,82.3
EZFET_VCORE
  Top 0.203: MSP101.17 34.93,91.07 C101.1
EZFET_VREF
  Top 0.203: C121.1 31.98,84.75 31.98,86 MSP101.9
EZFET_VUSB
  Top 0.305: MSP101.54 23.04,86.25 20.36,86.25 20.09,85.98 | C107.1 20.09,85.98 | 20.09,85.98
EZFET_XT2IN
  Top 0.203: MSP101.57 25.16,86.27 24.23,85.32 23.24,85.32 22.06,84.14 22,84.07
  Top 0.406: Q101.1 22.06,84.08 22.06,84.14
EZFET_XT2OUT
  Top 0.203: MSP101.58 24.79,85.17 24.79,82.8 24.2,82.21
  Top 0.406: Q101.3 24.2,81.96 24.2,82.21
GND  (via drill 0.3)
  Top 0.152: v25.17,95.25 25.17,93.47 25.43,93.22 MSP101.39 | MSP102.TP 38.76,96.39 39.14,96.77 MSP102.14 | 26.79,88.05 26.82,88.01 MSP101.TP 27.2,88.65
  Top 0.203: 33.63,89.31 33.53,89.31 | 33.63,89.31 33.63,89.3 MSP101.16 | MSP101.56 24.83,86.66 | MSP101.39 25.93,92.76 25.93,92.61 25.76,92.43 | MSP101.14 32.79,88.72 32.79,89.05 33.1,89.38 33.53,89.38 33.63,89.31
  Top 0.254: 24.83,86.66 24.86,86.66 25.12,86.92 v25.12,88.16 | Q101.2 22.95,82.9 21.62,81.56
  Top 0.305: 21.62,81.56 18.46,81.53 C102.2 | MSP1.8 22.45,54.73 22.2,54.74 v21.79,54.33
  Bottom 0.203: v20.68,82.32 21.23,82.32 21.72,82.8
  other vias: 10.57,85.73 8.89,86.74 51.08,100.2 41.45,96.77 24.18,84.68 33.91,92.79 35.33,89.28 19.96,100.46 23.01,93.34 53.49,81.36 43.69,97.94 46.18,84.68 45.75,86.51 47.83,94.23 44.09,91.19 52.7,98.93 17.25,98.04 47.07,100.46 35.56,90.55 48.34,89.03 49.1,92.86 8.43,82.63 16.59,83.97 25.17,96.88 28.85,97.89 17.07,82.75 22.35,80.87 19.02,83.87 27.08,74.17 27.41,85.37 30.66,91.57 12.22,80.14 22.12,97.56 5.18,90.55 5.23,94.23 16.66,100.33 5.79,97.51 15.72,92.48 13.36,87.25 11.66,92.53 14.88,95.25 16.1,88.39 8.41,89.28 11.46,94.49 27.71,82.3 47.8,90.14 38.4,88.52 41.61,92.15 42.62,85.6 49.76,97.1 21.62,91.44 41.81,89 7.9,80.01 48.29,71.25 48.41,59.82 45.62,71.37 43.08,71.37 38.1,72.14 1.17,81.28 1.17,90.17 1.17,95.63 21.74,100.46 46.13,3.94 57.18,6.48 57.18,10.16 57.18,53.34 57.18,59.69 57.18,66.04 57.18,72.39 57.2,78.66 57.48,86.97 57.53,91.57 57.53,95.58 54.69,94.95 56.44,85.09 54.64,77.98 54.64,72.52 11.35,64.8 19.33,71.88 46.25,62.61 13.23,34.04 15.39,33.91 17.81,33.91 20.35,33.91 22.89,33.91 25.43,33.91 27.97,33.91 30.63,33.78 33.05,33.78 35.59,33.78 38.13,33.78 40.67,33.78 43.21,33.78 43.84,11.81 45.11,11.68 48.29,33.78 44.98,41.4 22.63,64.92 7.65,33.78 10.31,33.91 10.19,20.32 10.19,26.8 15.27,26.92 15.27,20.19 17.93,20.19 17.93,26.92 20.47,26.8 20.47,20.07 23.14,27.05 23.01,20.19 25.43,27.31 25.55,20.19 28.09,27.31 28.09,20.32 30.76,27.18 30.89,20.32 33.17,27.18 33.17,20.32 35.84,27.18 35.59,20.32 38.25,27.18 38.25,20.32 40.92,27.18 40.92,20.32 43.46,27.18 43.59,20.32 48.29,27.05 48.29,20.45 8.41,13.84 5.87,15.88 4.34,16.64 52.6,17.78 50.06,16.13 47.52,14.48 48.41,49.02 50.6,47.68 49.05,44.2 49.68,42.55 15.39,69.09 19.58,66.04 7.01,1.65 11.79,0.81 21.74,1.02 1.04,5.59 1.04,13.08 1.04,22.86 1.04,31.75 1.04,41.91 1.17,52.07 1.3,61.72 1.04,72.01 40.03,2.29 44.35,2.29 32.08,7.09 24.03,7.62 13.82,8.08 6.73,7.92 42.14,8.23 57.18,18.29 57.3,27.94 57.3,37.72 57.3,45.97 16.79,58.93 16.79,60.07 49.07,37.26 50.83,52.07 50.24,55.8 44.73,66.17 38.51,69.6 35.97,68.96 5.36,73.53 32.79,68.96 1.55,66.17 11.4,59.08 25.43,77.72 27.08,75.69 15.77,77.72 15.77,75.95 7.9,75.69 45.75,68.96 25.91,80.49 48.03,68.33 5.74,69.09 13.59,66.6 50.7,50.42 31.52,2.06 16.89,63.17 11.96,57.76 16.87,51.66 16.87,53.04 12.19,54.71 16.92,56.36 6.05,85.09 19.15,91.19 17.3,85.85 26.59,90.04 28.19,88.37 38.15,95.5 39.42,94.62 21.49,89.53 7.21,91.9 12.85,94.49 13.36,90.55 28.91,91.8 53.64,90.58 37.72,87.81 34.04,84.51 52.86,78.41 49.02,84.96 54.05,84.46 50.06,78.82 53.44,83.49 45.67,80.87 26.64,67.39 24.23,60.02 51.26,89.03 28.88,93.34 36.12,98.68 42.24,82.65
  pour Top: 0.03,101.6 0.03,0 58.45,0 58.45,101.6
  pour Bottom: 0.03,101.6 0.03,0 58.45,0 58.45,101.6
L0
  Top 0.203: LCD1.35 43.21,38.23 42.82,38.61 42.82,50.55 44.73,52.45 44.73,55.88 43.33,57.28 43.33,62.61 40.79,65.15 27.2,65.15 25.54,63.48 MSP1.64
L1  (via drill 0.3)
  Top 0.203: LCD1.36 45.75,37.34 43.71,39.37 43.71,49.4 45.11,50.8 45.11,56.13 43.71,57.53 43.71,62.99 41.15,65.56 28.4,65.56 v27.76,66.22 | MSP1.63 26.04,62.71 27.71,64.39
  Top 0.406: v27.71,64.36 27.71,64.39
  Bottom 0.203: v27.71,64.36 27.71,66.17 v27.76,66.22
L2  (via drill 0.3)
  Top 0.203: v28.78,66.17 41.17,66.17 44.22,63.12 44.22,57.79 45.49,56.52 45.49,50.55 44.22,49.28 44.22,39.62 LCD1.37 | MSP1.62 26.54,62.2 v28.73,64.39
  Bottom 0.203: v28.73,64.39 28.73,66.12 v28.78,66.17
L3  (via drill 0.3)
  Top 0.203: LCD1.38 50.83,36.58 44.73,42.8 44.73,49.15 45.87,50.29 45.87,56.77 44.73,57.91 44.73,63.25 41.17,66.8 v29.74,66.8 | MSP1.61 27.04,61.68 v29.74,64.39
  Bottom 0.203: v29.74,64.39 v29.74,66.8
L4  (via drill 0.3)
  Top 0.203: v42.57,60.07 42.57,62.74 40.54,64.77 31.14,64.77 27.54,61.17 MSP1.60 | LCD1.4 45.75,13.72 52.1,20.07 52.1,36.32 45.62,42.93 45.62,49.28 46.25,49.91 46.25,57.02 45.49,57.79 v45.49,60.07
  Bottom 0.203: v42.57,60.07 v45.49,60.07
L5  (via drill 0.3)
  Top 0.203: v41.81,59.44 41.81,62.87 40.28,64.39 31.39,64.39 28.04,61.03 MSP1.59 | LCD1.3 48.29,15.49 52.6,19.81 52.6,36.58 46,43.18 46,49.02 46.63,49.66 46.63,57.15 46.13,57.66 46.13,59.31 v46.18,59.36
  Bottom 0.203: v41.81,59.44 46.1,59.44 v46.18,59.36
L6  (via drill 0.3)
  Top 0.203: LCD1.2 50.83,17.02 53.24,19.43 53.24,36.58 46.38,43.43 46.38,48.9 47.04,49.56 47.04,58.57 v46.91,58.7 | v42.6,58.7 41.35,58.7 40.92,59.13 40.92,63.12 40.03,64.01 31.65,64.01 28.54,60.9 MSP1.58
  Bottom 0.203: v42.6,58.7 v46.91,58.7
L7  (via drill 0.3)
  Top 0.203: v48.41,57.68 48.41,50.29 46.76,48.64 46.76,43.82 53.75,36.83 53.75,19.05 53.37,18.67 LCD1.1 | v42.57,57.68 41.78,57.68 40.41,59.06 40.41,62.99 39.78,63.63 31.78,63.63 29.04,60.89 MSP1.57
  Bottom 0.203: v42.57,57.68 v48.41,57.68
L8
  Top 0.203: LCD1.20 5.11,16.89 4.22,17.78 4.22,36.58 12.98,45.34 15.52,45.34 16.54,46.36 20.47,46.36 24.66,50.55 24.66,52.83 25.43,53.59 25.43,55.37 29.54,59.48 MSP1.56
L9
  Top 0.203: LCD1.19 7.65,15.11 4.72,18.03 4.72,36.45 13.23,44.96 15.77,44.96 16.79,45.97 20.6,45.97 25.04,50.42 25.04,52.58 25.81,53.34 25.81,55.12 30.04,59.35 MSP1.55
L10
  Top 0.203: LCD1.18 10.19,13.34 5.36,18.16 5.36,36.32 13.61,44.58 16.03,44.58 16.92,45.47 20.65,45.47 21.23,46.05 24.79,49.66 25.55,50.42 25.55,52.32 26.19,52.96 26.19,54.99 30.54,59.34 MSP1.54
L11  (via drill 0.3)
  Top 0.203: LCD1.17 12.73,15.11 9.04,18.67 9.04,37.34 14.38,42.67 21.23,42.67 23.65,45.09 v25.3,45.09 | MSP1.53 31.04,59.21 26.57,54.74 26.57,52.71 26.44,52.58 v26.44,51.94
  Bottom 0.203: v25.3,45.09 25.3,50.8 v26.44,51.94
L12  (via drill 0.3)
  Top 0.203: LCD1.16 15.27,13.72 11.46,17.53 11.46,38.48 14.76,41.78 21.49,41.78 23.65,43.94 25.93,43.94 v26.57,44.58 | MSP1.52 31.54,59.2 27.2,54.86 v27.2,52.96
  Bottom 0.203: v27.2,52.96 27.2,51.56 25.81,50.17 25.81,45.59 26.57,44.83 v26.57,44.58
L13  (via drill 0.3)
  Top 0.203: MSP1.51 32.03,59.18 27.84,54.99 v27.84,52.07 | v27.91,44.12 26.95,43.18 24.03,43.18 21.87,41.02 15.65,41.02 14,39.37 14,16.51 17.81,12.7 LCD1.15
  Bottom 0.203: v27.84,52.07 27.84,51.56 26.31,50.04 26.31,45.72 v27.91,44.12
L14  (via drill 0.3)
  Top 0.203: MSP1.50 32.54,59.06 28.6,55.12 v28.6,52.83 | v28.73,43.18 27.97,42.42 24.28,42.42 22.12,40.26 16.28,40.26 15.65,39.62 15.65,37.08 16.54,36.2 16.54,16.51 20.35,12.7 LCD1.14
  Bottom 0.203: v28.6,52.83 28.6,51.44 26.82,49.66 26.82,46.23 28.73,44.32 v28.73,43.18
L15  (via drill 0.3)
  Top 0.203: 33.05,60.19 33.05,58.93 29.49,55.37 v29.49,51.94 | LCD1.13 22.89,12.7 19.08,16.51 19.08,36.07 21.23,38.23 23.14,38.23 25.32,40.41 29.64,40.41 30.51,41.28 v30.51,41.3 | 33.05,60.2 33.05,60.19 | 33.05,60.19 MSP1.49
  Bottom 0.203: v30.51,41.3 30.35,41.43 29.36,42.42 29.36,44.32 27.33,46.36 27.33,49.53 29.24,51.44 v29.49,51.94
L16  (via drill 0.3)
  Top 0.203: LCD1.12 24.28,11.3 24.16,36.96 26.19,38.99 34.44,38.99 39.01,43.56 v39.01,51.69 | v43.08,51.69 44.35,52.96 44.35,55.5 42.82,57.02 41.81,57.02 40.6,58.23 MSP1.48
  Bottom 0.203: v43.08,51.69 v39.01,51.69
L17  (via drill 0.3)
  Top 0.203: LCD1.11 26.7,11.43 26.7,36.96 28.35,38.61 34.82,38.61 39.65,43.43 39.65,52.07 39.01,52.71 v39.01,53.59 | MSP1.47 40.46,57.73 41.55,56.64 42.57,56.64 43.71,55.5 v43.71,53.72
  Bottom 0.203: v39.01,53.59 43.59,53.59 v43.71,53.72
L18  (via drill 0.3)
  Top 0.203: v43.08,52.96 43.08,55.5 42.44,56.13 41.3,56.13 40.2,57.23 MSP1.46 | LCD1.10 29.24,11.43 29.24,36.96 30.38,38.1 34.82,38.1 40.03,43.31 40.03,52.71 v39.78,52.96
  Bottom 0.203: v43.08,52.96 v39.78,52.96
L19
  Top 0.203: MSP1.45 40.07,56.73 41.43,55.37 41.43,42.16 36.86,37.59 36.86,9.27 36.35,8.76 33.55,8.76 33.05,9.27 LCD1.9
L20
  Top 0.203: MSP1.44 39.55,56.23 41.05,54.74 41.05,42.55 34.32,35.94 34.32,11.43 LCD1.8
L21
  Top 0.203: MSP1.43 39.54,55.73 40.54,54.74 40.54,43.05 34.95,37.47 33.17,37.47 31.78,36.07 31.78,9.65 33.3,8.13 36.6,8.13 38.13,9.65 LCD1.7
L22  (via drill 0.3)
  Top 0.203: LCD1.6 40.67,13.08 39.4,14.35 39.4,37.21 41.81,39.62 41.81,54.86 v42.27,55.35 | MSP1.42 34.99,55.24 38.76,55.24 v39.01,54.99
  Top 0.406: v39.01,54.99
  Bottom 0.203: v39.01,54.99 41.93,54.99 42.27,55.32 | 42.27,55.32 42.32,55.37 | v42.27,55.35 42.27,55.32
L23  (via drill 0.3)
  Top 0.203: LCD1.5 43.21,15.49 41.94,16.76 41.94,38.86 42.44,39.37 v42.44,54.36 | MSP1.41 38.38,54.73 38.76,54.36 v39.78,54.36
  Bottom 0.203: v42.44,54.36 v39.78,54.36
L24
  Top 0.203: LCD1.27 22.89,36.45 25.93,39.5 34.32,39.5 38.38,43.56 38.38,53.59 37.74,54.23 MSP1.40
L25
  Top 0.203: LCD1.26 21.11,35.56 25.55,40.01 34.19,40.01 38,43.82 38,53.21 37.48,53.73 MSP1.39
L26
  Top 0.203: LCD1.25 20.85,38.61 22.89,38.61 25.17,40.89 29.24,40.89 30.89,42.55 36.09,42.55 37.62,44.07 37.62,52.83 37.22,53.23 MSP1.38
L36
  Top 0.203: LCD1.24 15.27,40.13 15.77,40.64 22,40.64 24.16,42.8 27.46,42.8 29.24,44.58 30,44.58 31.04,45.62 MSP1.28
L37
  Top 0.203: LCD1.23 12.73,38.74 15.39,41.4 21.62,41.4 23.77,43.56 26.44,43.56 27.84,44.96 29.74,44.96 30.54,45.75 MSP1.27
L38
  Top 0.203: LCD1.22 10.19,37.85 14.5,42.16 21.36,42.16 23.65,44.45 25.55,44.45 26.44,45.34 29.36,45.34 30.04,46.01 MSP1.26
L39
  Top 0.203: LCD1.21 7.65,36.45 14.25,43.05 20.98,43.05 23.65,45.72 28.98,45.72 29.54,46.28 MSP1.25
N$1
  Top 0.203: 32.66,97.03 32.82,97.18 | 32.82,97.18 32.92,97.28 | R101.1 32.66,97.28 | 32.66,97.28 | 32.82,97.18 LED101.A 32.66,97.27 32.66,97.28
N$2
  Top 0.203: R102.1 32.14,98.41 32.73,99 | 32.73,99 32.79,99.06 | LED102.A 32.73,99
N$4
  Top 0.254: C1.1 18.82,61.09 | MSP1.1 22.18,58.23 19.33,61.09 18.95,61.09
  Top 0.406: C1.1 18.95,61.09
N$6
  Top 0.203: R4.1 27.46,5.59 JP1.2
N$7
  Top 0.203: R4.2 24.37,5.55 23.9,5.08 23.9,4.18 LED1.A
N$8
  Top 0.203: LED2.A 34.73,5.01 R5.2
N$10
  Top 0.254: MSP1.2 22.05,57.73 19.71,60.07 18.91,60.07 C2.1
N$11
  Top 0.254: MSP1.4 21.14,56.73 19.96,57.91 18.94,57.91 C4.1
N$12
  Top 0.305: R119.1 45.53,89.75 45.87,89.41 46.76,89.41 46.78,89.39 T102.2
N$13
  Top 0.254: T102.1 D101.2 D101.1 46.27,94.88 45.87,94.49 44.98,94.49 R118.1
  Top 0.305: R118.1 44.79,94.5
N$14
  Top 0.203: 19.86,55.25 Y1.P2 | Y1.P2 19.47,55.36 18.9,55.93 18.9,56.43 C5.1 | MSP1.6 20.83,55.73 20.35,55.25 19.99,55.25 Y1.P2
N$15
  Top 0.635: L101.1 53.23,86.64 53.23,86.74 | 53.23,86.74 53.24,87.76 53.24,88.27 52.48,89.03 T101.3 | D102.3 48.68,87 49.17,87.5 52.35,87.5 53.11,86.74 53.23,86.74
N$16
  Top 0.203: T102.3 48.8,90.03 48.29,90.55 48.29,93.73 48.79,94.23 49.68,94.23 49.96,93.96 R120.2 | T101.1 50.38,89.73 50.06,90.04 T102.3 | 48.79,90.04 T102.3
  Top 0.406: 48.79,94.23 D101.3
N$17
  Top 0.254: MSP1.5 20.88,56.23 19.96,57.15 18.6,57.15 C4.2
N$18
  Top 0.203: 19.84,54.23 19.91,54.31 19.96,54.31 19.95,54.29 Y1.P1 | Y1.P1 19.52,54.29 18.87,53.65 C6.1 | Y1.P1 20.41,54.29 21.36,55.25 23.57,55.25 MSP1.7
N$19
  Top 0.203: 18.79,58.98 C3.1
  Top 0.254: MSP1.3 21.74,57.23 19.99,58.98 18.91,58.98 C3.1
P1.0/TXD  (via drill 0.3)
  Top 0.203: v11.84,13.34 6.38,18.8 6.38,35.81 14.25,43.69 v16.92,43.69 20.98,43.69 23.67,46.38 v28.7,46.38 29.03,46.71 29.03,47.09 29.04,47.32 MSP1.24 | v13.87,13.34 13.87,9.27 14.63,8.51 28.09,8.51 29.24,7.37 JP1.1 | J1.4 7.77,54.48 7.77,53.21 10.44,50.55 13.49,50.55 v14.12,49.91 | v39.27,62.61 38.89,62.23 37.62,62.23 31.14,55.75 v31.14,52.07 | v41.17,71.12 41.17,71.25 42.06,72.14 42.95,72.14 J101.8
  Bottom 0.203: v11.84,13.34 v13.87,13.34 | v39.27,62.61 41.17,64.52 v41.17,71.12 | v31.14,52.07 31.14,51.69 28.73,49.28 28.73,46.36 v28.7,46.38 | v14.12,49.91 14.12,48.77 16.15,46.74 16.15,44.45 v16.92,43.69
P1.1/RXD  (via drill 0.3)
  Top 0.203: v17.68,44.32 20.85,44.32 23.55,47.02 v28.04,47.02 28.54,47.51 MSP1.23 | J1.3 8.41,56.39 8.41,53.34 10.82,50.93 14.12,50.93 v15.14,49.91 | v38.38,62.99 37.74,62.99 30.33,55.58 v30.33,52.81 | v40.54,70.36 40.54,71.37 41.94,72.77 J101.10
  Bottom 0.203: v38.38,62.99 38.76,62.99 40.54,64.77 v40.54,70.36 | v30.33,52.81 30.33,51.77 27.97,49.4 27.97,47.07 v28.04,47.02 | v17.68,44.32 17.17,44.32 16.66,44.83 16.66,46.99 15.14,48.51 v15.14,49.91
P1.2
  Top 0.203: 28.04,48.2 MSP1.22 28.09,48.73 28.09,48.39 28.04,48.34 28.04,47.98 27.69,47.62 23.52,47.62 20.85,44.96 17.17,44.96 16.41,44.2 14,44.2 5.87,36.07 5.87,18.29 11.46,12.7 11.46,7.02 11.47,7.02 S1.4 11.46,6.87 11.46,6.98 20.07,6.98 S1.3
P1.3  (via drill 0.3)
  Top 0.203: MSP1.21 27.54,49.61 27.71,49.78 33.43,49.78 33.81,49.4 33.81,47.75 34.57,46.99 v35.2,46.99
  Bottom 0.203: 52.22,45.72 J2.8 50.83,46.99 48.79,46.99 48.54,46.74 47.14,46.74 46.89,46.99 v35.2,46.99
P1.4  (via drill 0.3)
  Top 0.203: v48.16,47.37 48.16,43.94 48.79,43.31 51.97,43.31 J2.9 | MSP1.20 27.04,49.62 27.58,50.17 33.55,50.17 34.19,49.53 34.19,48.13 34.7,47.62 v35.97,47.62
  Bottom 0.203: v35.97,47.62 47.02,47.62 47.27,47.37 v48.16,47.37
P1.5  (via drill 0.3)
  Top 0.203: J2.10 50.57,40.64 47.52,43.69 v47.52,48.26 | MSP1.19 26.54,49.75 27.33,50.55 33.81,50.55 34.57,49.78 34.57,48.51 34.82,48.26 v35.2,48.26
  Bottom 0.203: v35.2,48.26 v47.52,48.26
P1.6  (via drill 0.3)
  Top 0.203: J2.3 49.56,60.96 v47.78,60.96 | v39.65,60.2 37.49,60.2 v36.73,59.44 | MSP1.18 26.04,49.89 27.08,50.93 32.41,50.93 33.05,51.56 33.05,55.63 v33.3,55.88
  Bottom 0.203: v39.65,60.2 40.41,60.96 v47.78,60.96 | v33.3,55.88 v36.73,59.44
P1.7  (via drill 0.3)
  Top 0.203: J2.2 51.46,61.6 v46.51,61.6 | MSP1.17 25.54,49.9 26.95,51.31 32.16,51.31 32.41,51.56 32.41,56.01 v33.3,56.9 | v39.52,61.21 37.62,61.21 v35.71,59.31
  Bottom 0.203: v33.3,56.9 v35.71,59.31 | v46.51,61.6 40.41,61.6 39.9,61.6 v39.52,61.21
P2.3/RTS  (via drill 0.3)
  Top 0.203: v43.46,66.17 45.49,64.14 45.49,61.72 49.05,58.17 v49.05,52.88 | v43.46,68.71 37.49,68.71 36.86,69.34 J101.14 | 35.08,52.71 35.05,52.73 MSP1.37 35.01,52.71 36.09,52.71 36.2,52.6 v36.55,52.6
  Bottom 0.203: v43.46,66.17 v43.46,68.71 | v49.05,52.88 49.05,52.83 48.54,52.32 38,52.32 37.69,52.63 v36.55,52.6
P2.4/CTS  (via drill 0.3)
  Top 0.203: v47.65,51.46 47.65,58.93 45.11,61.47 45.11,63.63 42.7,66.04 v42.7,66.68 | v42.7,69.34 39.9,69.34 39.4,69.85 J101.12 | MSP1.36 35.04,52.23 35.08,52.2 35.97,52.2 36.4,51.77 v36.98,51.77
  Bottom 0.203: v42.7,66.68 v42.7,69.34 | v47.65,51.46 47.24,51.05 37.69,51.05 v36.98,51.77
P2.5  (via drill 0.3)
  Top 0.203: J1.8 6.63,45.97 v14.12,45.97 | MSP1.35 35.8,51.73 36.35,51.18 36.73,51.18 37.11,50.8 37.11,44.2 35.84,42.93 30.63,42.93 28.98,41.28 24.92,41.28 22.63,38.99 18.44,38.99 17.68,38.23 v16.54,38.23
  Bottom 0.203: v16.54,38.23 14.63,40.13 14.63,45.47 v14.12,45.97
P2.6  (via drill 0.3)
  Top 0.203: S2.4 46.09,6.87 46.15,6.93 46.17,6.93 S2.3 46.76,6.86 46.76,6.6 44.48,8.89 44.48,37.85 43.33,38.99 43.33,50.04 v43.71,50.42 | MSP1.34 35.66,51.23 36.47,50.42 v36.5,50.42
  Bottom 0.203: v43.71,50.42 v36.5,50.42
P2.7  (via drill 0.3)
  Top 0.203: J1.5 6.88,53.34 10.31,49.91 v13.11,49.91 | MSP1.33 35.53,50.73 35.84,50.42 35.84,50.04 36.6,49.28 36.6,44.32 35.59,43.31 30.38,43.31 28.73,41.66 24.66,41.66 22.5,39.5 17.81,39.5 v17.55,39.24
  Bottom 0.203: v17.55,39.24 15.77,41.02 15.77,46.36 13.11,49.02 v13.11,49.91
P4.0
  Top 0.203: R5.1 32.93,5.72 31.9,5.72 31.27,5.08 31.27,3.3 30.38,2.41 23.77,2.41 20.73,5.46 9.68,5.46 8.15,6.98 4.85,6.98 3.58,8.26 3.58,50.42 5.11,51.94 7.52,51.94 10.19,49.28 20.09,49.28 20.98,50.17 20.98,51.31 22.41,52.73 MSP1.12
P5.0  (via drill 0.3)
  Top 0.203: v49.05,46.36 49.05,48.51 50.06,49.53 50.06,54.61 51.33,55.88 J2.4 | MSP1.32 33.04,47.38 34.06,46.36 35.08,46.36 35.08,46.35 v35.96,46.35 v35.97,46.36
  Bottom 0.203: v35.97,46.36 v49.05,46.36
P5.1  (via drill 0.3)
  Top 0.203: v16.54,39.24 17.04,39.88 22.25,39.88 24.54,42.04 28.47,42.04 30.38,43.94 v33.93,43.94 | J1.7 8.03,46.61 14.5,46.61 v15.14,45.97 | MSP1.31 32.54,46.61 33.43,45.72 v33.93,45.72
  Bottom 0.203: v33.93,45.72 v33.93,43.94 | v15.14,45.97 15.14,40.64 v16.54,39.24
P5.2  (via drill 0.3)
  Top 0.203: v49.81,45.72 49.81,48.51 J2.6 | v34.95,45.72 34.19,44.96 33.43,44.96 32.04,46.35 MSP1.30
  Bottom 0.203: v34.95,45.72 v49.81,45.72
P5.3  (via drill 0.3)
  Top 0.203: J2.7 50.44,46.61 50.44,45.47 50.06,45.09 v48.79,45.09 | v35.84,45.09 35.2,45.09 34.7,44.58 33.17,44.58 31.54,46.21 MSP1.29
  Bottom 0.203: v35.84,45.09 v48.79,45.09
P8.0
  Top 0.203: J1.6 10.19,46.99 20.35,46.99 22.76,49.4 22.76,50.42 23.07,50.73 MSP1.16
P8.1  (via drill 0.3)
  Top 0.203: v11.07,51.56 8.92,53.72 8.92,58.42 J1.2 | v13.23,47.62 20.35,47.62 22.25,49.53 22.25,50.67 22.81,51.23 MSP1.15
  Bottom 0.203: v13.23,47.62 13.23,48.26 12.34,49.15 12.34,51.05 11.84,51.56 v11.07,51.56
P8.2  (via drill 0.3)
  Top 0.203: v11.96,45.21 9.93,45.21 7.9,43.18 J1.9 | v11.96,47.62 12.6,48.26 20.35,48.26 21.87,49.78 21.87,50.93 22.68,51.73 MSP1.14
  Bottom 0.203: v11.96,47.62 v11.96,45.21
P8.3  (via drill 0.3)
  Top 0.203: v10.95,47.62 12.09,48.77 20.22,48.77 21.49,50.04 21.49,51.18 22.54,52.23 MSP1.13 | v10.95,44.58 10.31,44.58 J1.10
  Bottom 0.203: v10.95,47.62 v10.95,44.58
RST/SBWTDIO  (via drill 0.3)
  Top 0.203: 47.02,74.04 J101.6 47.02,68.83 v46.25,68.07 22.76,68.07 19.14,64.45 v18.89,64.45 C11.1 R1.2 18.94,62.1 21.11,62.1 24.66,58.55 24.66,54.1 24.29,53.73 MSP1.10 | J2.5 54.64,55.88 54.64,64.26 52.22,66.68 v46.25,66.68 | S3.3 S3.4 16.14,67.68 v16.54,68.07
  Bottom 0.203: v46.25,66.68 v46.25,68.07 | v18.89,64.45 16.54,66.8 v16.54,68.07
TEST/SBWTCK
  Top 0.203: J101.4 49.43,73.53 49.43,68.33 48.54,67.44 27.84,67.44 25.04,64.64 25.04,53.85 24.43,53.23 MSP1.11

## Text on the board
tPlace: RST | 1 | 21 | 20 | 10 | 11 | P5.7 | P5.6 | P5.5 | P5.4 | P2.2 | P2.1 | P2.0 | NC | NC | NC | NC | NC | NC | NC | P7.0 | P7.1 | P7.2 | P7.3 | P3.0 | P3.1 | P3.2 | P3.3 | P3.4 | P3.5 | P3.6 | P3.7 | P6.0 | P6.1 | P6.2 | P6.3 | P6.4 | P6.5 | P6.6 | P6.7 | P7.4 | P7.5 | P7.7 | P7.6 | GND | GND | 3V3 | P1.0 | P4.0 | P1.2 | P2.6
tDocu: IC103 | eZ-FET Rev1.2 | Rev 1.0 | MSP-EXP430FR4133 | GND | 5V | 3V3 | RTS >> | CTS << | RXD << | TXD >> | SBWTDIO | SBWTCK | 5V | GND | P8.1 | PWM | A9 | P1.7 | P1.1 | I/O! | RXD | P1.6 | P1.0 | I/O | TXD | P5.0 | P2.7 | I/O! | !RST | P8.0 | MOSI | A8 | P5.2 | P5.1 | MISO | SCLK | P5.3 | P2.5 | I/O! | I/O! | P1.3 | P8.2 | I/O! | SCL | * | P1.4 | P8.3 | * | I/O! | SDA | P1.5